# Altium PCB final.PcbDoc
Units mil, origin at the board's own origin, x right, y up, seen from the top; angles counter-clockwise.
Board outline 3937.01 x 3937.01 mil, 2 copper layers (Top Layer, Bottom Layer); 72 components, 53 nets, 264 pads, 7 vias.
Unrouted connection lines stored in the file: 4.
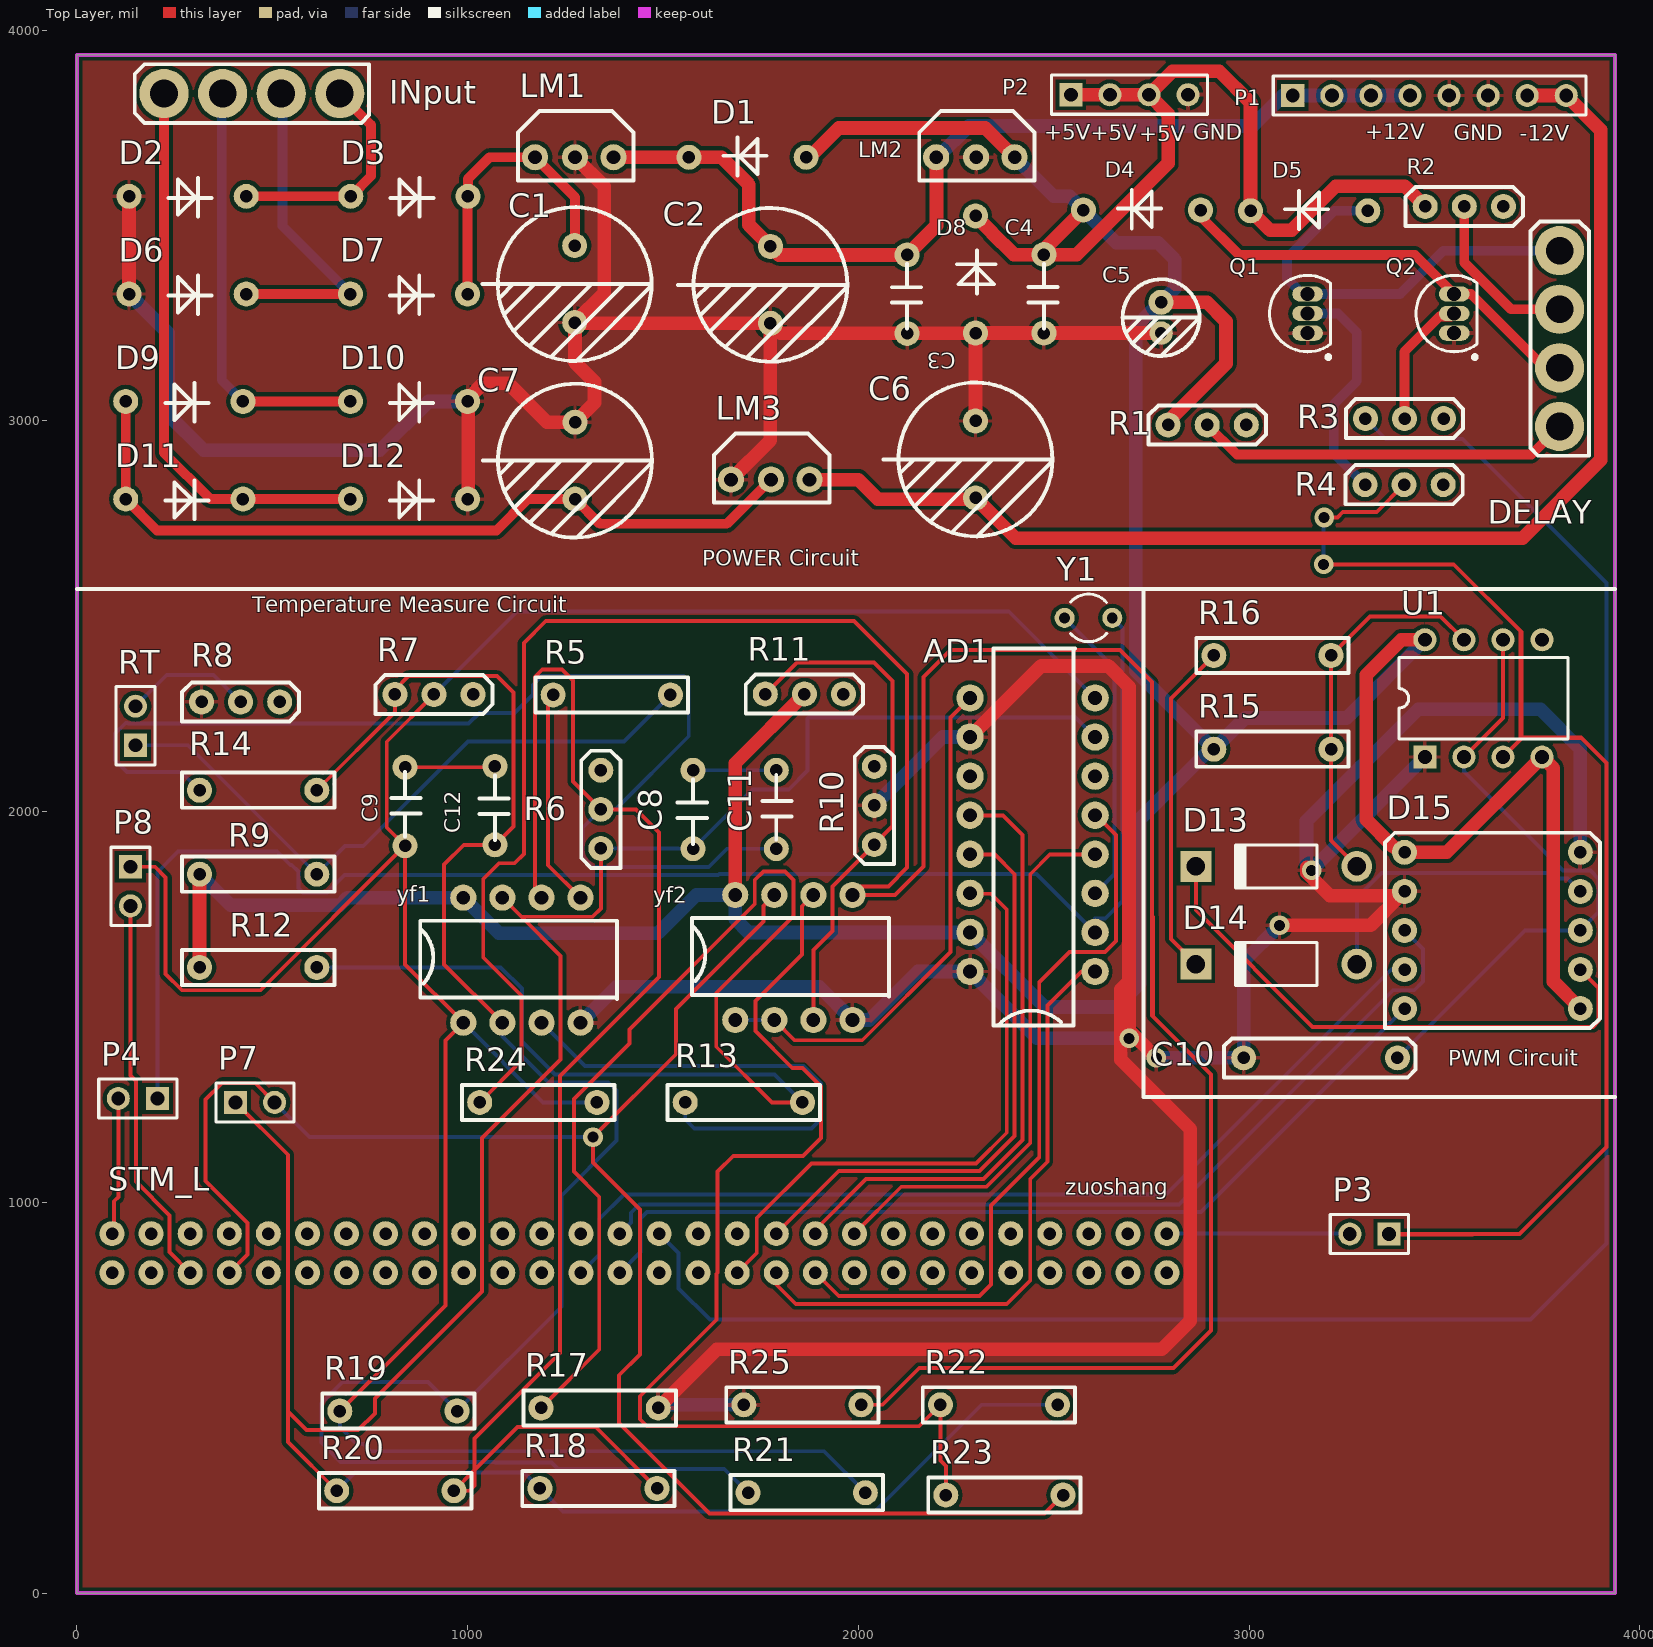
[diagram p0: Top Layer view]
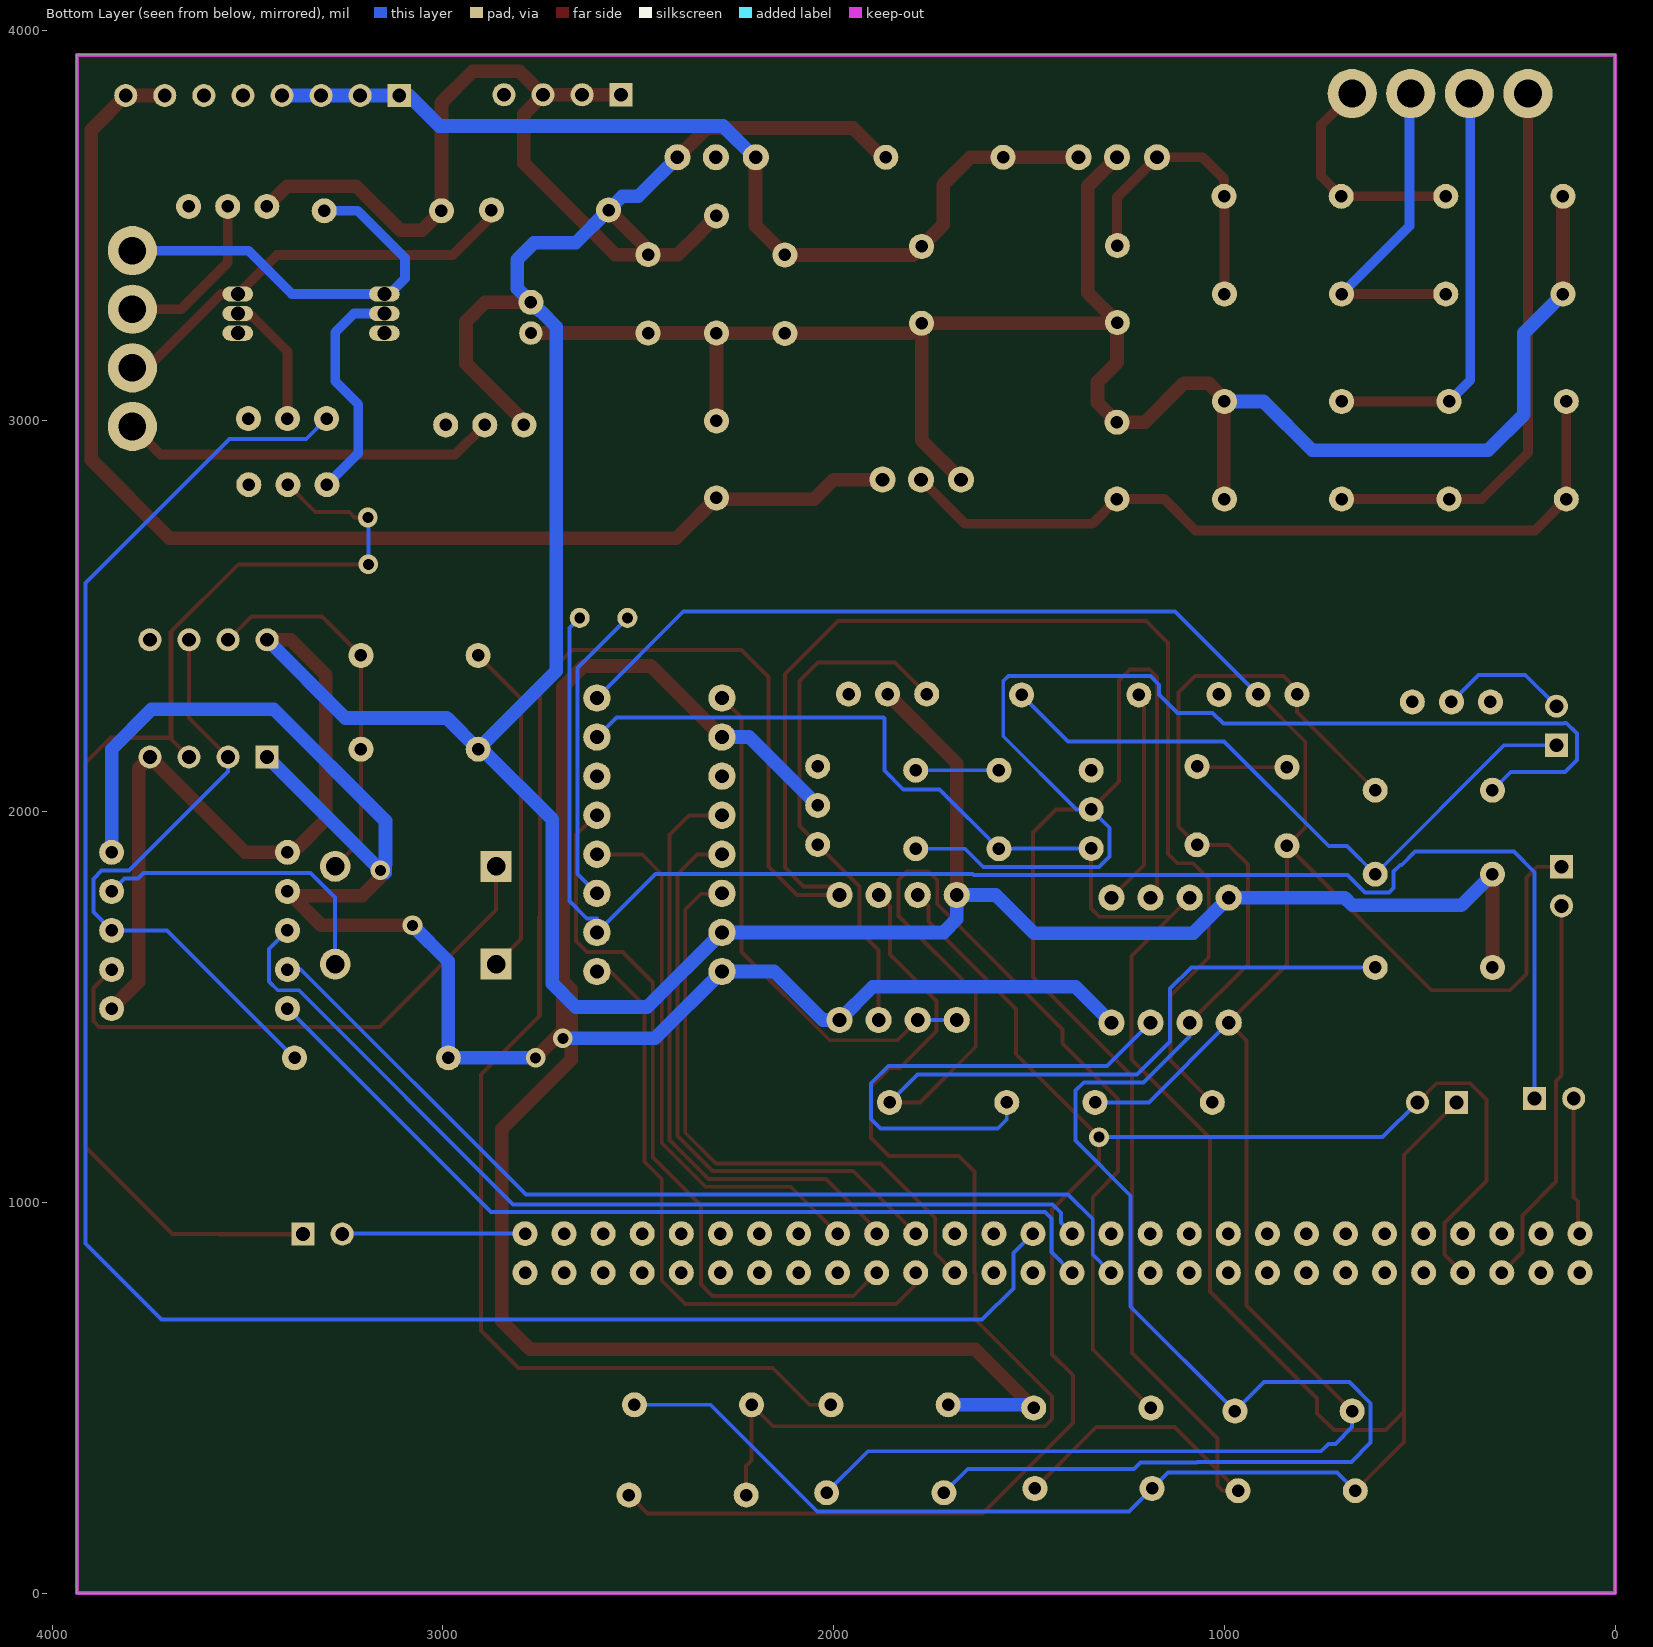
[diagram p1: Bottom Layer view, seen from below]

## Layer stack, top to bottom
Top Solder: solder mask 0.4, Solder Resist, Dk 3.5
Top Layer: signal copper 1.4
Dielectric 1: dielectric 12.6, FR-4, Dk 4.8
Bottom Layer: signal copper 1.4
Bottom Solder: solder mask 0.4, Solder Resist, Dk 3.5

## Board outline
0,0 3937.01,0 3937.01,3937.01 0,3937.01

## Design rules (kind name [scope] priority, off if disabled: settings)
Clearance [All] p1: gap=10 ignorepadtopadclearanceinfootprint=FALSE except(0: Arc-Hole Track-Hole SMDPad-Hole THPad-Hole Via-Hole Fill-Hole Poly-Hole Region-Hole Text-Hole)
PolygonConnect [All] p1: connectstyle=Relief reliefconductorwidth=10 reliefentries=4 polygonreliefangle="90 Angle" airgapwidth=10
RoutingVias [All] p1: holewidth=28 width=50 viastyle="Through Hole" minholewidth=28 minwidth=50 maxholewidth=28 maxwidth=50
SolderMaskExpansion [All] p1: expansion=4
Width Width_1 [InNetClass('1234')] p1: maxlimit=50 minlimit=30 preferedwidth=35
Width [All] p2: maxlimit=25 minlimit=10 preferedwidth=10
30 further rules are at their usual default settings.

## Classes and differential pairs
component class change: AD1 C2 C3 C4 C5 C6 C8 C9 C10 C11 C12 D1 D2 D3 D4 D5 D6 D7 D8 D9 D10 D11 D12 D13 D15 DELAY INput LM1 LM2 LM3 P1 P2 P3 P4 P7 P8 Q1 Q2 R1 R2 R3 R4 R6 R7 R8 R9 R11 R12 R13 R15 R16 R17 R18 R19 R20 R21 R22 R23 R24 R25 RT STM_L Y1 yf1
net class 1234: +12V -12V GND VCC

## Components (designator, comment, footprint, x,y, rotation, side; value= is the part's Value field where it differs from the comment)
AD1 "AD7705" xinpian16 2606,1591 r90 top
C1 "capaji1000u" capaji1000 1274,3448.85 r270 top
C2 "470uF" capaji1000 1775,3446.85 r270 top
C3 "capa0.1u" capa0.1 2125,3224.21 r90 top
C4 "capa0.1u" capa0.1 2475,3225 r90 top
C5 "capaji10u" capaji10u 2775,3303.74 r270 top
C6 "capaji1000u" capaji1000 2300,3000 r270 top
C7 "capaji1000u" capaji1000 1275,2996.85 r270 top
C8 "0.4uF" capa0.1 1577,1905.21 r90 top
C9 "0.4uF" capa0.1 840,2113.79 r270 top
C10 "DIP-2 Capacitance" "DIP-2 Capacitance" 2986.3,1370 r0 top
C11 "0.4uF" capa0.1 1790,2106 r270 top
C12 "0.4uF" capa0.1 1070,1915.21 r90 top
D1 "1N4007" 1N4007 1866.54,3675 r180 top
D2 "1N4007" 1N4007 133.46,3575 r0 top
D3 "1N4007" 1N4007 701,3575 r0 top
D4 "1N4007" 1N4007 2876,3540 r180 top
D5 "1N4007" 1N4007 3304,3538 r180 top
D6 "1N4007" 1N4007 133.46,3325 r0 top
D7 "1N4007" 1N4007 700,3325 r0 top
D8 "1N4007" 1N4007 2300,3225 r90 top
D9 "1N4007" 1N4007 125,3050 r0 top
D10 "1N4007" 1N4007 700,3050 r0 top
D11 "1N4007" 1N4007 125,2800 r0 top
D12 "1N4007" 1N4007 700,2800 r0 top
D13 "Diode 1N4001" DO-41 3070,1860 r180 top
D14 "Diode 1N4001" DO-41 3070,1610 r180 top
D15 "digital_r" DIGITAL_R 3398,1896 r0 top
DELAY "header for input" "header for input" 3795,2986 r90 top
INput "header for input" "header for input" 673,3838 r180 top (schematic designator INPUT)
LM1 "LM7812" LM7812 1172.64,3675 r0 top
LM2 "LM7812" LM7812 2199.21,3675 r0 top
LM3 "L7912" LM7812 1674.21,2850 r0 top
P1 "Header 8" HDR1X8 3112,3833 r0 top
P2 "Header 4" HDR1X4 2544,3835 r0 top
P3 "Header 2" HDR1X2 3358,919 r180 top
P4 "Header 2" HDR1X2 206,1266 r180 top
P7 "Header 2" HDR1X2 406,1256 r0 top
P8 "Header 2" HDR1X2 137,1859 r270 top
Q1 "2N3904" TO-92A 3150,3275 r0 top
Q2 "2N3904" TO-92A 3525,3275 r0 top
R1 "reaj" REAJ 2793,2990 r0 top
R2 "reaj" REAJ 3451,3549 r0 top
R3 "reaj" REAJ 3298,3006 r0 top
R4 "reaj" REAJ 3297,2837 r0 top
R5 "DIP-2 resistance" "Direct insertion resistance" 1219,2299 r0 top
R6 "25k" REAJ 1341,1906 r90 top
R7 "25k" REAJ 814,2300 r0 top
R8 "25k" REAJ 319,2281 r0 top
R9 "DIP-2 resistance" "Direct insertion resistance" 614,1840 r180 top
R10 "10k" REAJ 2041,1916 r90 top
R11 "10k" REAJ 1762,2301 r0 top
R12 "DIP-2 resistance" "Direct insertion resistance" 614,1601.5 r180 top
R13 "DIP-2 resistance" "Direct insertion resistance" 1557,1256 r0 top
R14 "DIP-2 resistance" "Direct insertion resistance" 314,2055 r0 top
R15 "DIP-2 resistance" "Direct insertion resistance" 3210,2160 r180 top
R16 "DIP-2 resistance" "Direct insertion resistance" 2910,2400 r0 top
R17 "DIP-2 resistance" "Direct insertion resistance" 1488,474 r180 top
R18 "DIP-2 resistance" "Direct insertion resistance" 1485,268 r180 top
R19 "DIP-2 resistance" "Direct insertion resistance" 673,466 r0 top
R20 "DIP-2 resistance" "Direct insertion resistance" 965,262 r180 top
R21 "DIP-2 resistance" "Direct insertion resistance" 2018,257 r180 top
R22 "DIP-2 resistance" "Direct insertion resistance" 2210,482 r0 top
R23 "DIP-2 resistance" "Direct insertion resistance" 2524,251 r180 top
R24 "DIP-2 resistance" "Direct insertion resistance" 1031,1256 r0 top
R25 "DIP-2 resistance" "Direct insertion resistance" 1707,482 r0 top
RT "Header 2" HDR1X2 150,2170 r90 top
STM_L "STM32zet6-left" STM32zet6-left 1690,920 r270 top
U1 "NE555P" P008 3600,2290 r0 top
Y1 "XTAL" R38 2589,2496 r90 top
yf1 "OPA2227P" yunfang8 989,1780 r0 top
yf2 "OPA2227P" yunfang8 1685,1787 r0 top

## Footprints (in the part's own frame and the unit in brackets; to place one, negate y for a bottom-side part, rotate by r counter-clockwise, add the part's x,y. Pads: shape width x height; smd on the part's side, far side on the other; paste and mask are expansions set on the pad)
1N4007 [mil]
  round 64 hole 32: 1(0,0) 2(300,0)
  silkscreen extent 101,-51 212,47
capa0.1 [mil]
  round 64 hole 32: 1(0,0) 2(200.79,0)
  silkscreen extent 12,-35 177,39
capaji10u [mil]
  round 64 hole 32: 1(0,0)
  round 60 hole 30: 2(78.74,0)
  silkscreen extent -59,-98 138,98
capaji1000 [mil]
  round 64 hole 32: 3(0,0) 4(196.85,0)
  silkscreen extent -98,-236 295,197
DIGITAL_R [mil]
  round 64 hole 32: 1(0,0) 2(0,-100) 3(0,-200) 4(0,-300) 5(0,-400) 6(450,0) 7(450,-100) 8(450,-200) 9(450,-300) 10(450,-400)
  silkscreen extent -50,-450 500,50
"DIP-2 Capacitance" [mil]
  round 64 hole 32: 1(0,0) 2(393.7,0)
  silkscreen extent -50,-50 440,50
"Direct insertion resistance" [mil]
  round 64 hole 32: 1(0,0) 2(300,0)
  silkscreen extent -45,-45 345,45
DO-41 [mm] "Diode, Axial; Body 5.2 x 2.7 mm (LxDia. max), Lead Dia. 0.86 mm (max)"
  round 2 hole 1.2: 1(-5.23,0)
  rect 2x2 hole 1.2: 2(5.23,0)
  silkscreen extent -2.65,-1.4 2.75,1.4
HDR1X2 [mm] "Connector; Header; 2 Position"
  rect 1.5x1.5 hole 0.9: 1(0,0)
  round 1.5 hole 0.9: 2(2.54,0)
  silkscreen extent -1.27,-1.27 3.81,1.27
HDR1X4 [mm] "Connector; Header; 4 Position"
  rect 1.5x1.5 hole 0.9: 1(0,0)
  round 1.5 hole 0.9: 2(2.54,0) 3(5.08,0) 4(7.62,0)
  silkscreen extent -1.27,-1.27 8.89,1.27
HDR1X8 [mm] "Connector; Header; 8 Position"
  rect 1.5x1.5 hole 0.9: 1(0,0)
  round 1.5 hole 0.9: 2(2.54,0) 3(5.08,0) 4(7.62,0) 5(10.16,0) 6(12.7,0) 7(15.24,0) 8(17.78,0)
  silkscreen extent -1.27,-1.27 19.05,1.27
"header for input" [mm]
  round 3.2 hole 1.8: 1(0,0) 2(3.81,0) 3(7.62,0) 4(11.43,0)
  silkscreen extent -1.91,-1.91 13.33,1.91
LM7812 [mil]
  round 67 hole 35: 1(0,0) 2(102.36,0) 3(200.79,0)
  silkscreen extent -43,-59 252,118
P008 [mm] "DIP; 8 Leads; Row Spacing 7.62 mm; Pitch 2.54 mm"
  rect 1.5x1.5 hole 0.9: 1(-3.81,-3.81)
  round 1.5 hole 0.9: 2(-1.27,-3.81) 3(1.27,-3.81) 4(3.81,-3.81) 5(3.81,3.81) 6(1.27,3.81) 7(-1.27,3.81) 8(-3.81,3.81)
  silkscreen extent -5.5,-2.65 5.5,2.65
R38 [mm] "Crystal, Thru-Hole; 2 Leads; Body 3.1 x 8.2 mm (Dia.xH)"
  round 1.3 hole 0.7: 1(0,1.55) 2(0,-1.55)
  silkscreen extent -1.55,-1.19 1.55,1.17
REAJ [mil]
  round 64 hole 32: 1(0,0) 2(100,0) 3(200,0)
  silkscreen extent -50,-50 250,50
STM32zet6-left [mil]
  round 64 hole 32: 1(0,1100) 2(100,1100) 3(0,1000) 4(100,1000) 5(0,900) 6(100,900) 7(0,800) 8(100,800) 9(0,700) 10(100,700) 11(0,600) 12(100,600) 13(0,500) 14(100,500) 15(0,400) 16(100,400) 17(0,300) 18(100,300) 19(0,200) 20(100,200) 21(0,100) 22(100,100) 23(0,0) 24(100,0) 25(0,-100) 26(100,-100) 27(0,-200) 28(100,-200) 29(0,-300) 30(100,-300) 31(0,-400) 32(100,-400) 33(0,-500) 34(100,-500) 35(0,-600) 36(100,-600) 37(0,-700) 38(100,-700) 39(0,-800) 40(100,-800) 41(0,-900) 42(100,-900) 43(0,-1000) 44(100,-1000) 45(0,-1100) 46(100,-1100) 47(0,-1200) 48(100,-1200) 49(0,-1300) 50(100,-1300) 51(0,-1400) 52(100,-1400) 53(0,-1500) 54(100,-1500) 55(0,-1600) 56(100,-1600)
TO-92A [mm] "TO, Flat Index; 3 In-Line, Axial Leads; Body Dia. 4.5mm; Leads 0.51 x 0.48 mm (max)"
  oval 2x1 hole 0.9: 1(0,-1.27) 2(0,0) 3(0,1.27)
  silkscreen extent -2.48,-2.95 1.5,2.48, body extent -2.48,-2.5 1.5,2.5, height 6.86
xinpian16 [mil]
  round 70 hole 35: 1(0,0) 2(100,0) 3(200,0) 4(300,0) 5(400,0) 6(500,0) 7(600,0) 8(700,0) 9(700,320) 10(600,320) 11(500,320) 12(400,320) 13(300,320) 14(200,320) 15(100,320) 16(0,320)
  silkscreen extent -138,51 827,260
yunfang8 [mil]
  round 67 hole 35: 1(0,-320) 2(100,-320) 3(200,-320) 4(300,-320) 5(300,0) 6(200,0) 7(100,0) 8(0,0)
  silkscreen extent -110,-260 394,-59

## Part data
C2: library part capaji1000u
C5: "10u"
C8 C9 C11 C12: library part capa0.1u
D13 D14: "1 Amp General Purpose Rectifier", Code_JEDEC=DO-204-AL, ComponentLink1Description="Manufacturer Link", ComponentLink1URL=http://www.fairchildsemi.com/, ComponentLink2Description=Datasheet, ComponentLink2URL=http://www.fairchildsemi.com/ds/1N%2F1N4001.pdf, DatasheetVersion=1998, LatestRevisionDate=17-Jul-2002, LatestRevisionNote="Re-released for DXP Platform.", PackageDescription="Diode, Axial; Body 5.2 x 2.7 mm (LxDia. max), Lead Dia. 0.86 mm (max)", PackageReference=DO-41, PackageVersion=Aug-1999, Published=8-Jun-2000, Publisher="Altium Limited"
P1: "Header, 8-Pin", LatestRevisionDate=17-Jul-2002, LatestRevisionNote="Re-released for DXP Platform.", Publisher="Altium Limited"
P2: "Header, 4-Pin", LatestRevisionDate=17-Jul-2002, LatestRevisionNote="Re-released for DXP Platform.", Publisher="Altium Limited"
P3 P4 P7 P8 RT: "Header, 2-Pin", LatestRevisionDate=17-Jul-2002, LatestRevisionNote="Re-released for DXP Platform.", Publisher="Altium Limited"
Q1 Q2: "NPN General Purpose Amplifier", ComponentLink1Description="Manufacturer Link", ComponentLink1URL=http://www.fairchildsemi.com/, ComponentLink2Description=Datasheet, ComponentLink2URL=http://www.fairchildsemi.com/ds/2N%2F2N3904.pdf, DatasheetVersion=1997, LatestRevisionDate=15-Jan-2003, LatestRevisionNote="PCB Footprint 'BCY-W3/D4.7' replaced", PackageDescription="TO, Flat Index; 3 In-Line, Axial Leads; Body Dia. 4.5mm; Leads 0.51 x 0.48 mm (max)", PackageReference=TO-92A, PackageVersion=Sep-1998, Published=8-Jun-2000, Publisher="Altium Limited"
R6 R7 R8 R10 R11: library part reaj
U1: "Precision Timer", Code_JEDEC=MO-001-AN, ComponentLink1Description="Manufacturer Link", ComponentLink1URL=http://www.ti.com/, ComponentLink2Description=Datasheet, ComponentLink2URL=http://www-s.ti.com/sc/ds/ne555.pdf, DatasheetVersion=Feb-1992, LatestRevisionDate=04-Mar-2005, LatestRevisionNote="Stylized 3D Model Added.", PackageDescription="DIP; 8 Leads; Row Spacing 7.62 mm; Pitch 2.54 mm", PackageReference=P008, PackageVersion=Jun-1999, Published=16-Jan-2001, Publisher="Altium Limited"
Y1: "Crystal Oscillator", LatestRevisionDate=17-Jul-2002, LatestRevisionNote="Re-released for DXP Platform.", PackageDescription="Crystal, Thru-Hole; 2 Leads; Body 3.1 x 8.2 mm (Dia.xH)", PackageReference=R38, Published=8-Jun-2000, Publisher="Altium Limited"

## Via types
v1: diameter 50, hole 28, Top Layer to Bottom Layer, 7 vias

## Nets (pads, with @x,y where several pads share a name; then routed paths per layer and width w, separated by ;. In a path a pad name is that pad's centre, name@x,y a point inside that pad or via, vN(x,y) a via of type N, cw(c..) or ccw(c..) an arc to the next point about the centre after c; other vN are vias at no path point)
+12V: C2.3 C3.2 D1.2 LM1.3 LM2.1 P1.1 P1.2 P1.3 P1.4 | length 2475.2
  Top Layer w35: LM1.3 D1.2 1650,3675 1720,3605 1720,3501.85 C2.3 1796.85,3425 C3.2 2200,3500 2200,3674.21 LM2.1
  Bottom Layer w35: LM2.1 2203,3675 2283,3755 3009,3755 3087,3833 P1.1 P1.2 P1.3 P1.4
-12V: C6.4 LM3.3 P1.7 P1.8 | length 3242
  Top Layer w35: LM3.3 2000,2850 2050,2800 2296.85,2800 C6.4 2403.15,2700 3700,2700 3900,2900 3900,3745 P1.8 P1.7
ADC_1: P7.2 R23.1 STM_L.50 yf2.7 | length 4440.5
  Top Layer w10: STM_L.50 437,867 437,947 329,1055 329,1263 371,1305 457,1305 P7.2 ; yf2.7 1756.85,1758.85 1756.85,1718.5 1533.19,1494.83 1533.19,1379.19 v1(1321,1167) 1321,1102 1441,982 1441,610.5 1388,557.5 1388,435.52 1619.52,204 2477,204 R23.1
  Bottom Layer w10: P7.2 595,1167 v1(1321,1167)
ADC_2: P8.2 STM_L.52 | length 1002.4
  Top Layer w10: P8.2 137,1325 151,1311 151,1053 237,967 237,873 STM_L.52
Cold: R3.1 STM_L.27 | length 5131
  Bottom Layer w10: STM_L.27 1540,870 1540,780 1620,700 3720,700 3915,895 3915,2585 3546,2954 3350,2954 R3.1
GND: AD1.10 AD1.16 C1.4 C2.4 C3.1 C4.1 C5.2 C6.3 C7.3 C10.1 D2.1 D6.1 D8.1 D10.2 D12.2 D15.2 D15.10 LM1.2 LM2.2 LM3.1 P1.5 P1.6 P2.4 Q1.1 Q2.1 R8.1 R10.2 R17.1 R25.1 U1.1 yf1.4 yf2.4 | length 13999.7
  Top Layer w35: D6.1 D2.1 ; D12.2 1002,2800 1002,3058.24 1040.61,3096.85 1103.15,3096.85 1203.15,2996.85 C7.3 1325,3046.85 1325,3100 1275,3150 C1.4@1275,3253.15 ; LM1.2 1350,3600 1350,3328.15 C1.4@1275,3253.15 ; R17.1 1638,624 2777.04,624 2850,696.96 2850,1187 2672,1365 2672,1440 ; LM3.1 1775,2950.79 C2.4 ; AD1.10 2468,2373 2640,2373 2693,2320 2693,1566 ; C6.3 D8.1 ; v1(2693,1420) v1@2693,1440 ; v1(2763,1370) v1@2693,1440 ; C5.2 C4.1 D8.1 ; v1(3078,1709) 3311,1709 D15.2@3387,1785 ; v1@3148,1858 3148,1844 3207,1785 D15.2@3387,1785 ; D15.2 D15.2@3387,1785 ; C1.4@1275,3253.15 1278.15,3250 C2.4 ; C2.4 1800.79,3224.21 C3.1 2299.21,3224.21 D8.1 ; 2672,1440 v1@2693,1440 ; 2672,1440 2672,1545 ; 2672,1545 2693,1566 ; 2672,1545 2693,1545 ; v1@2693,1440 2693,1545 ; 2693,1545 2693,1566
  Bottom Layer w35: D6.1 233.46,3225 233.46,3016.54 325,2925 775,2925 900,3050 D10.2 ; yf1.4 1381,1552 1900,1552 yf2.4 2028,1467 2152,1591 AD1.16 2457,1420 v1(2693,1420) ; R17.1 1496,482 R25.1 ; R10.2 2216,2191 AD1.10 ; v1(2763,1370) C10.1 2986.3,1617.3 v1(3078,1709) ; v1@3148,1844 3148,1858 3147,1866 3147,1976 3433,2262 3746,2262 3848,2160 3848,1896 ; v1(3160,1850) U1.1
Hot: P3.1 R4.2 U1.3 | length 3804.6
  Top Layer w10: v1(3191,2633) 3524,2633 3694.53,2462.47 ; v1(3192,2753) 3226,2753 3240,2767 3327,2767 R4.2 ; P3.1 P3.1@3366,919 ; P3.1@3359,926 P3.1@3366,919 ; U1.3 3697.03,2187.03 ; P3.1@3366,919 3367,918 3572,918 3573,919 ; P3.1@3366,919 3573,919 ; 3573,919 3692,919 3915,1142 3915,2125 3851,2189 ; 3694.53,2462.47 3694.53,2189.53 3697.03,2187.03 ; 3694.53,2462.47 3697.03,2459.97 3697.03,2189 ; 3697.03,2187.03 3699,2189 ; 3697.03,2187.03 3697.03,2189 ; 3697.03,2189 3699,2189 ; 3699,2189 3851,2189 ; 3699,2189 3700,2190 3850,2190 3851,2189
  Bottom Layer w10: v1(3191,2633) v1@3191,2754
MCLK: P4.2 STM_L.55 | length 352.6
  Top Layer w10: STM_L.55 95,925 95,1003 106,1014 P4.2
MISO: AD1.13 STM_L.21 | length 1518.4
  Top Layer w10: STM_L.21 1950,1080 2310,1080 2400,1170 2400,1840 2350,1890 2290,1890 AD1.13
MOSI: AD1.14 STM_L.24 | length 1573.5
  Top Layer w10: STM_L.24 1740,870 1740,960 1880,1100 2301.72,1100 2380,1178.28 2380,1750 2340,1790 2290,1790 AD1.14
NetAD1_2: AD1.2 P4.1 Y1.2 | length 4011
  Bottom Layer w10: P4.1 206,1845 259,1898 512,1898 546,1864 550,1864 567,1847 567,1805 579,1793 640,1793 685.21,1838.21 1641.21,1838.21 1644,1841 2456,1841 AD1.2 2606,1727 2632,1727 2676,1771 2676,2470.02 Y1.2
NetAD1_3: AD1.3 Y1.1 | length 778.7
  Bottom Layer w10: Y1.1 2656,2367.98 2656,1841 AD1.3
NetAD1_7: AD1.7 C8.1 P7.1 R6.1 R18.2 R20.2 R22.2 yf1.7 | length 6828.7
  Top Layer w10: P7.1 540,1122 540,465 ; R20.2 540,387 540,465 ; yf1.7 1138,1731 ; R6.1 1341,1752 1320,1731 1138,1731 ; 540,465 588,417 720,417 763,460 763,498 1037,772 1037,1165 1238,1366 1238,1631 1138,1731
  Bottom Layer w10: R20.2 712,309 1144,309 R18.2 1244,209 2042,209 2315,482 R22.2 ; R6.1 1538.21,1906 1539,1905.21 C8.1 1728.79,2057 1822,2057 1870,2105 1870,2239 1872,2241 2556,2241 AD1.7
NetAD1_8: AD1.8 C9.2 P8.1 R7.2 R19.1 R21.1 R24.2 yf1.1 | length 6981.5
  Top Layer w10: P8.1 200,1859 227,1832 227,1585 269,1543 470,1543 C9.2 ; R19.1 943,736 943,1414 yf1.1 840,1609 C9.2 ; R7.2 793,2179 793,1960 C9.2
  Bottom Layer w10: R19.1 673,425 716,382 734,382 753,363 1912,363 R21.1 ; R7.2 1126,2512 2385,2512 AD1.8 ; yf1.1 1193,1256 R24.2
NetAD1_9: AD1.9 yf2.1 yf2.2 | length 1336.9
  Top Layer w10: yf2.2 1837,1415 2010,1415 2236,1641 2236,2241 AD1.9
  Bottom Layer w10: yf2.1 yf2.2
NetC1_3: C1.3 D3.2 D7.2 LM1.1 | length 758.8
  Top Layer w25: D7.2 1000,3574 D3.2 1001,3620 1056,3675 LM1.1 1275,3572.64 1275,3450 C1.3
NetC7_4: C7.4 D9.1 D11.1 LM3.2 | length 2040.7
  Top Layer w25: D9.1 D11.1 205,2720 1074,2720 1154,2800 C7.4 1338,2737 1663.57,2737 LM3.2
NetC8_2: C8.2 C11.1 | length 213
  Bottom Layer w10: C8.2 C11.1
NetC9_1: C9.1 C12.2 | length 230.9
  Top Layer w10: C9.1 1067.79,2113.79 C12.2
NetC10_2: C10.2 D15.8 U1.2 U1.6 | length 1591.8
  Top Layer w10: U1.2 3650,2240 U1.6
  Bottom Layer w10: C10.2 3706,1696 D15.8 3895,1743 3895,1828 3874,1849 3804,1849 3550,2103 U1.2
NetC11_2: C11.2 R6.2 R14.1 R18.1 R20.1 yf1.6 | length 6777.4
  Top Layer w10: yf1.6 1172,1797 1172,2345 1191,2364 1242,2364 1270,2336 1270,2077 R6.2 1431,2006 1490,1947 1490,1577 1237,1324 1237,615 1018,396 1018,315 ; R18.1 1328,425 1128,425 1018,315 ; 1018,315 1018,275 1005,262 R20.1 1018,315
  Bottom Layer w10: R14.1 267,2102 128,2102 98,2132 98,2200 125,2227 130.03,2227 131.56,2225.47 1002.47,2225.47 1030,2253 1120,2253 1167,2300 1167,2325 1189,2347 1553,2347 1566,2334 1566,2193 1379,2006 R6.2 1294,1959 1294,1885 1320.79,1858.21 1617.21,1858.21 1664.21,1905.21 C11.2
NetC12_1: C12.1 R7.1 R14.2 R19.2 R21.2 yf1.2 | length 4721.1
  Top Layer w10: R14.2 814,2255 R7.1 814,2312 849,2347 1075,2347 1117,2305 1117,1962.21 C12.1 990.21,1915.21 940,1865 940,1609 yf1.2
  Bottom Layer w10: yf1.2 1089,1425 1207,1307 1360,1307 1381,1286 1381,1158 1240,1017 1240,733 R19.2 899,540 680,540 626,486 626,385 675,336 1069,336 1071,334 1215,334 1231,318 1657,318 R21.2
NetD2_2: D2.2 D3.1 INput.1 | length 585.2
  Top Layer w25: D2.2 D3.1 753,3627 753,3758 INput.1
NetD4_1: D4.1 DELAY.2 Q2.3 | length 1081.1
  Top Layer w25: D4.1@2875,3525 2975,3425 3425,3425 Q2.3 3568,3325 3757,3136 DELAY.2
NetD5_1: D5.1 DELAY.4 Q1.3 | length 1069.7
  Bottom Layer w25: D5.1 3218,3538 3097,3417 3097,3365 3137,3325 Q1.3 3387,3325 3498,3436 DELAY.4
NetD6_2: D6.2 D7.1 INput.2 | length 814.6
  Top Layer w25: D6.2 D7.1
  Bottom Layer w25: INput.2@526,3801 526,3499 D7.1
NetD9_2: D9.2 D10.1 INput.3 | length 1097.4
  Top Layer w25: D9.2 D10.1
  Bottom Layer w25: INput.3@371,3850 371,3104 D9.2
NetD11_2: D11.2 D12.1 INput.4 | length 1445.6
  Top Layer w25: INput.4 223,2918.54 341.54,2800 D11.2 D12.1
NetD13_1: D13.1 R15.1 R16.2 U1.7 | length 973.6
  Top Layer w10: D13.1 3210,1925.91 R15.1 R16.2 3310,2500 3490,2500 U1.7
NetD13_2: D13.2 D15.7 | length 1424.5
  Top Layer w10: D13.2 2864.09,1747.91 3163,1449 3880,1449 3895,1464 3895,1549 3848,1596
NetD14_1: D14.1 D15.9 | length 787.6
  Bottom Layer w10: D14.1 3275.91,1779.91 3339,1843 3767,1843 3781,1829 3815,1829 3848,1796
NetD14_2: D14.2 R16.1 | length 862.1
  Top Layer w10: D14.2 2800,1674.09 2800,2290 R16.1
NetDELAY_1: DELAY.1 R1.2 | length 963.3
  Top Layer w25: R1.2 2969,2914 3723,2914 DELAY.1
NetDELAY_3: DELAY.3 R2.2 | length 437.3
  Top Layer w25: R2.2 3551,3405 3670,3286 DELAY.3
NetQ1_2: Q1.2 R4.1 | length 593.5
  Bottom Layer w25: Q1.2 3228,3275 3276,3227 3276,3102 3217,3043 3217,2917 R4.1
NetQ2_2: Q2.2 R3.2 | length 338.8
  Top Layer w25: R3.2 3398,3177.34 3487.84,3267.19 3517.19,3267.19 Q2.2
NetR5_1: R5.1 yf1.5 | length 558.8
  Top Layer w10: R5.1 1206,2286 1206,1863 yf1.5
NetR5_2: R5.2 R9.1 RT.1 | length 1695.8
  Bottom Layer w10: RT.1 284,2170 R9.1 686,1912 733,1912 1001,2180 1400,2180 R5.2
NetR8_2: R8.2 RT.2 | length 330.7
  Bottom Layer w10: RT.2 230,2350 350,2350 R8.2
NetR10_1: R10.1 R11.1 yf2.3 | length 1330.5
  Top Layer w10: R11.1 1843,2382 2040,2382 2088,2334 2088,1963 R10.1 1934,1809 1934,1695 1885,1646 yf2.3
NetR12_1: R12.1 R13.2 R17.2 | length 4001.7
  Top Layer w10: R17.2 1337,623 1337,1014 1272,1079 1272,1265 1414,1407 1414,1443 1735,1764 1735,1825 1757,1847 1812,1847 1834,1825 1834,1733 1636.5,1535.5 1636.5,1398.5 1779,1256 R13.2
  Bottom Layer w10: R12.1 1084.5,1601.5 1139,1547 1139,1412 1224,1327 1786,1327 R13.2
NetR13_1: R13.1 yf1.3 | length 1281.7
  Bottom Layer w10: yf1.3 1300,1349 1860,1349 1904,1305 1904,1213 1880,1189 1580,1189 1557,1212 R13.1
NetR22_1: R22.1 R23.2 yf2.6 | length 2820.2
  Top Layer w10: yf2.6 1856,1758 1856,1635 1736.5,1515.5 1736.5,1438.5 1831,1344 1857,1344 1904,1297 1904,1165 1858,1119 1680,1119 1640,1079 1640,820 1637,817 1637,699.75 1441,503.75 1441,445 1459,427 2155,427 R22.1 2210,339 2224,325 R23.2
NetR24_1: R24.1 R25.2 yf2.5 | length 7350.8
  Top Layer w10: R24.1 1138,1363 1138,1529 1040,1627 1040,1828 1080,1868 1120,1868 1144,1892 1144,2432 1200,2488 1989,2488 2125,2352 2125,1857 2077,1809 2007,1809 yf2.5 2094,1787 2167,1860 2167,2345 2236,2414 2670,2414 2752,2332 2752,1732 ; R25.2 2062,482 2156,576 2807,576 2903,672 2903,1327 2754,1476 ; 2752,1732 2754,1730 2754,1476 ; 2752,1732 2752,1478 2754,1476
PE1: D15.5 STM_L.30 | length 2338.4
  Bottom Layer w10: STM_L.30 1443,873 1443,959 1459,975 2877,975 D15.5
PE2: D15.3 STM_L.29 | length 2487.3
  Bottom Layer w10: STM_L.29 1418.62,948.62 1418.62,973.62 1440,995 2821,995 3369,1543 3423,1543 3445,1565 3445,1649 D15.3
PE3: D15.4 STM_L.32 | length 2482.2
  Bottom Layer w10: STM_L.32 1337,867 1337,957 1400,1020 2788,1020 3364,1596 D15.4
PG13: AD1.4 STM_L.17 | length 1429.1
  Top Layer w10: STM_L.17 2110,1040 2328.28,1040 2440,1151.72 2440,1840 2490,1890 2610,1890 AD1.4
PG14: AD1.5 STM_L.20 | length 1897.8
  Top Layer w10: STM_L.20 1950,760 2310,760 2340,790 2340,991.72 2463,1114.72 2463,1563 2541,1641 2631.71,1641 2660,1669.29 2660,1940 2610,1990 AD1.5
PG15: AD1.12 STM_L.19 | length 1570.1
  Top Layer w10: STM_L.19 1890,930 2020,1060 2320,1060 2420,1160 2420,1940 2370,1990 2290,1990 AD1.12
PWM: P3.2 STM_L.1 | length 468.4
  Bottom Layer w10: STM_L.1 3257,920 P3.2
SCLK: AD1.1 STM_L.22 | length 1613.5
  Top Layer w10: STM_L.22 1790,790 1840,740 2380,740 2440,800 2440,1060 2484,1104 2484,1504 2570,1590 2610,1590 AD1.1
VCC: AD1.15 C4.2 C5.1 D1.1 D4.2 D5.2 D8.2 D15.1 D15.6 LM2.3 P2.1 P2.2 P2.3 R1.1 R2.1 R9.2 R11.2 R12.2 R15.2 U1.4 U1.8 yf1.8 yf2.8 | length 12017.3
  Top Layer w35: R12.2 R9.2 ; yf2.8 1685,2124 R11.2 ; D1.1 1875,3675 1950,3750 2325,3750 LM2.3 ; D8.2 2341.23,3483.77 2341.23,3482.77 2398.21,3425.79 C4.2 ; P2.1 P2.2 P2.3 ; D4.2 2475,3439 C4.2 ; C5.1 2892.26,3303.74 2941,3255 2941,3147 2793,2999 R1.1 ; U1.8 3390,2440 3300,2350 3300,1980 3370,1910 3392,1902 D15.1 3506,1896 U1.4 3779,2111 3779,1565 3848,1496 ; R2.1 3399,3601 3222,3601 3109,3488 3054,3488 D5.2 3004,3815 2924,3895 2804,3895 P2.3 ; C4.2 2559.25,3425.79 2793,3659.54 2793,3786 P2.3
  Bottom Layer w35: R9.2 393.5,1760.5 673,1760.5 692.5,1780 yf1.8 1080,1689 1487,1689 1585,1787 yf2.8 1685,1725 1719,1691 AD1.15 2477,1500 2660,1500 2720,1560 2720,1980 2900,2160 R15.2 ; LM2.3 2500,3575 2541,3575 D4.2 2660,3456 2767,3456 2810,3413 2810,3338.74 C5.1 2753.76,3282.5 2751.18,3282.5 2710,3241.32 2710,2360 R15.2 ; U1.8 3250,2240 2990,2240 R15.2
pads on no net: AD1.6 AD1.11 R1.3 R2.3 R3.3 R4.3 R6.3 R7.3 R8.3 R10.3 R11.3 STM_L.2 STM_L.3 STM_L.4 STM_L.5 STM_L.6 STM_L.7 STM_L.8 STM_L.9 STM_L.10 STM_L.11 STM_L.12 STM_L.13 STM_L.14 STM_L.15 STM_L.16 STM_L.18 STM_L.23 STM_L.25 STM_L.26 STM_L.28 STM_L.31 STM_L.33 STM_L.34 STM_L.35 STM_L.36 STM_L.37 STM_L.38 STM_L.39 STM_L.40 STM_L.41 STM_L.42 STM_L.43 STM_L.44 STM_L.45 STM_L.46 STM_L.47 STM_L.48 STM_L.49 STM_L.51 STM_L.53 STM_L.54 STM_L.56 U1.5

## Polygon pours and split planes (outlines as drawn)
GND on Top Layer "GND_L01_P024" (solid, remove dead copper, pour order 24): -157,4123 -129,4151 4116,4151 4116,-40 4177,-101 -333,-101

## Keep-outs
Keep-Out Layer:
  the board outline again, w10

## Silkscreen, mask and mechanical layers (free items; w line width, h text height)
Top Overlay:
  lines w10: 0,2570 3937.01,2570 ; 2730,2570 2730,1270 3937.01,1270
  text "+12V" at 3297,3721 h40
  text "+5V" at 2476,3720 h40
  text "GND" at 2857,3720 h40
  text "+5V" at 2595,3718 h40
  text "GND" at 3524,3718 h40
  text "-12V" at 3693,3717 h40
  text "+5V" at 2719,3716 h40
  text "POWER Circuit" at 1600,2630 h40
  text "Temperature Measure Circuit" at 449,2510 h40
  text "PWM Circuit" at 3510,1350 h40

## Text inside footprints (layer, text, board x,y; h text height)
STM_L: Top Overlay "zuoshang" at 2530,1020 h40